# Altium PCB Charging_Dock_PCB.PcbDoc (part 1 of 2)
Units mm, origin at the board's own origin, x right, y up, seen from the top; angles counter-clockwise.
Board outline 320 x 215 mm, 2 copper layers (Top Layer, Bottom Layer); 121 components, 72 nets, 386 pads, 90 vias.
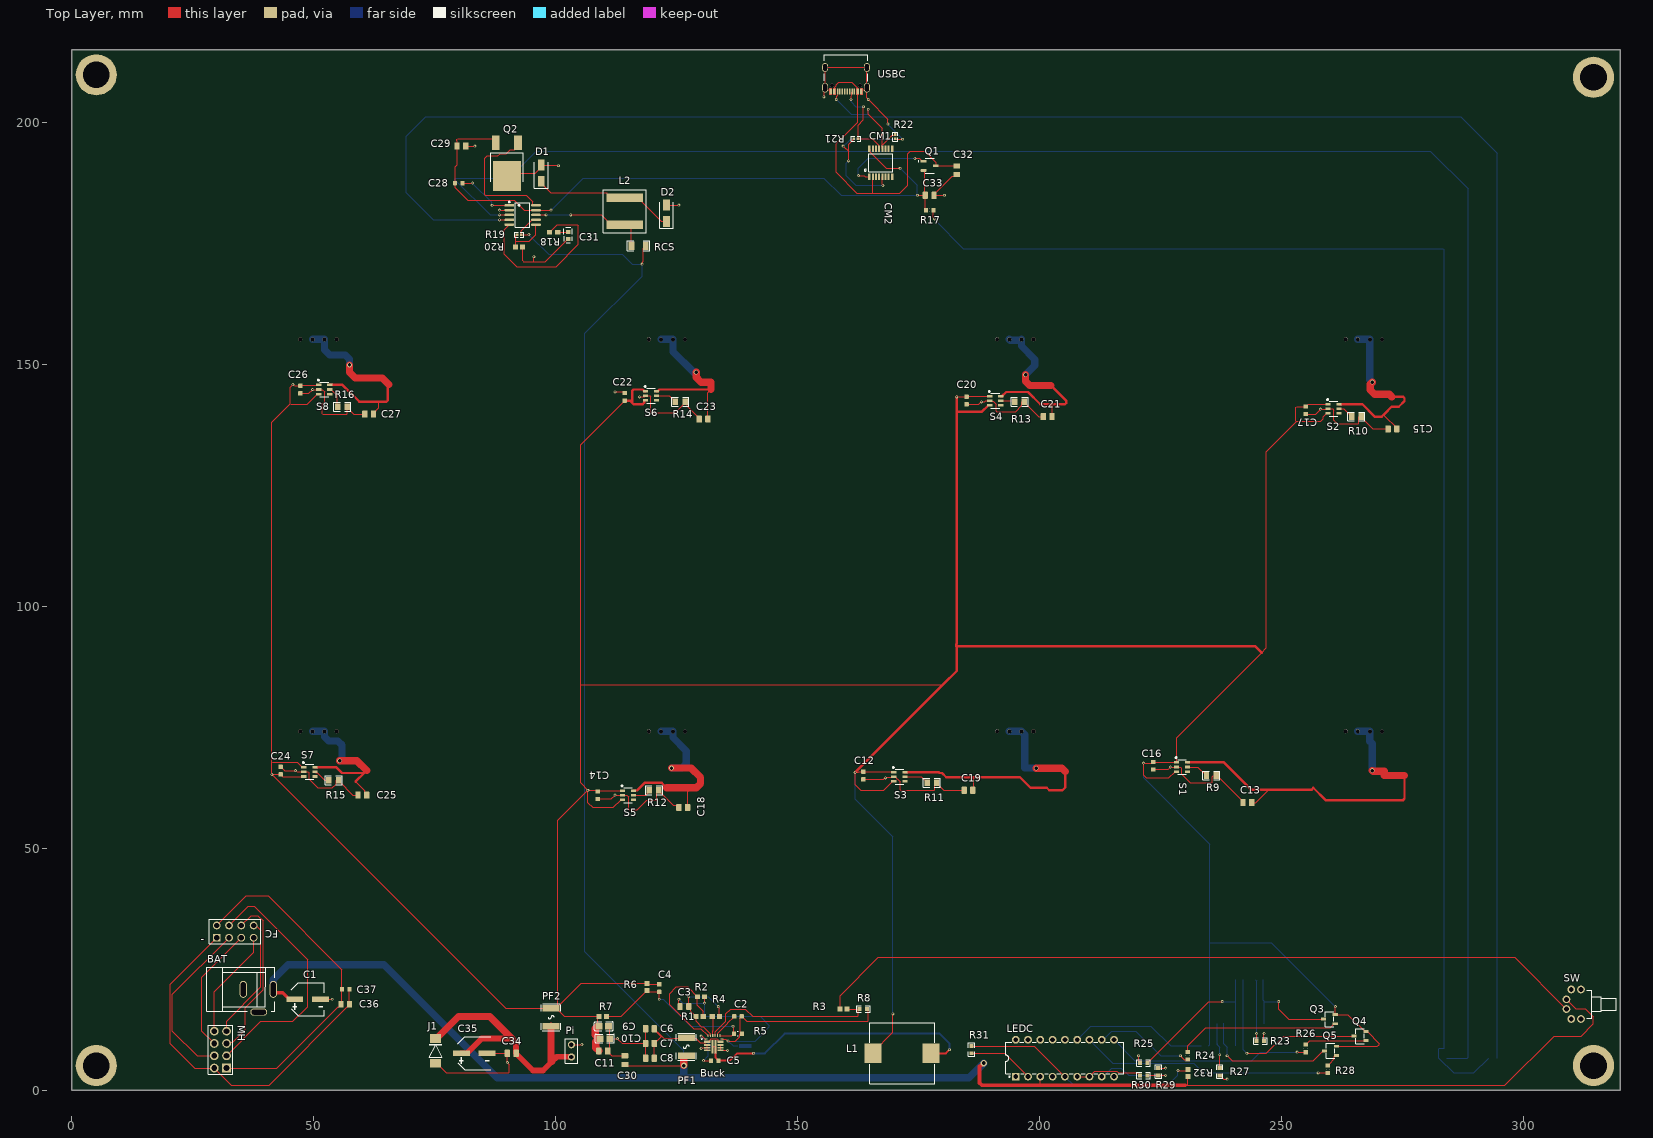
[diagram p0: Top Layer view]
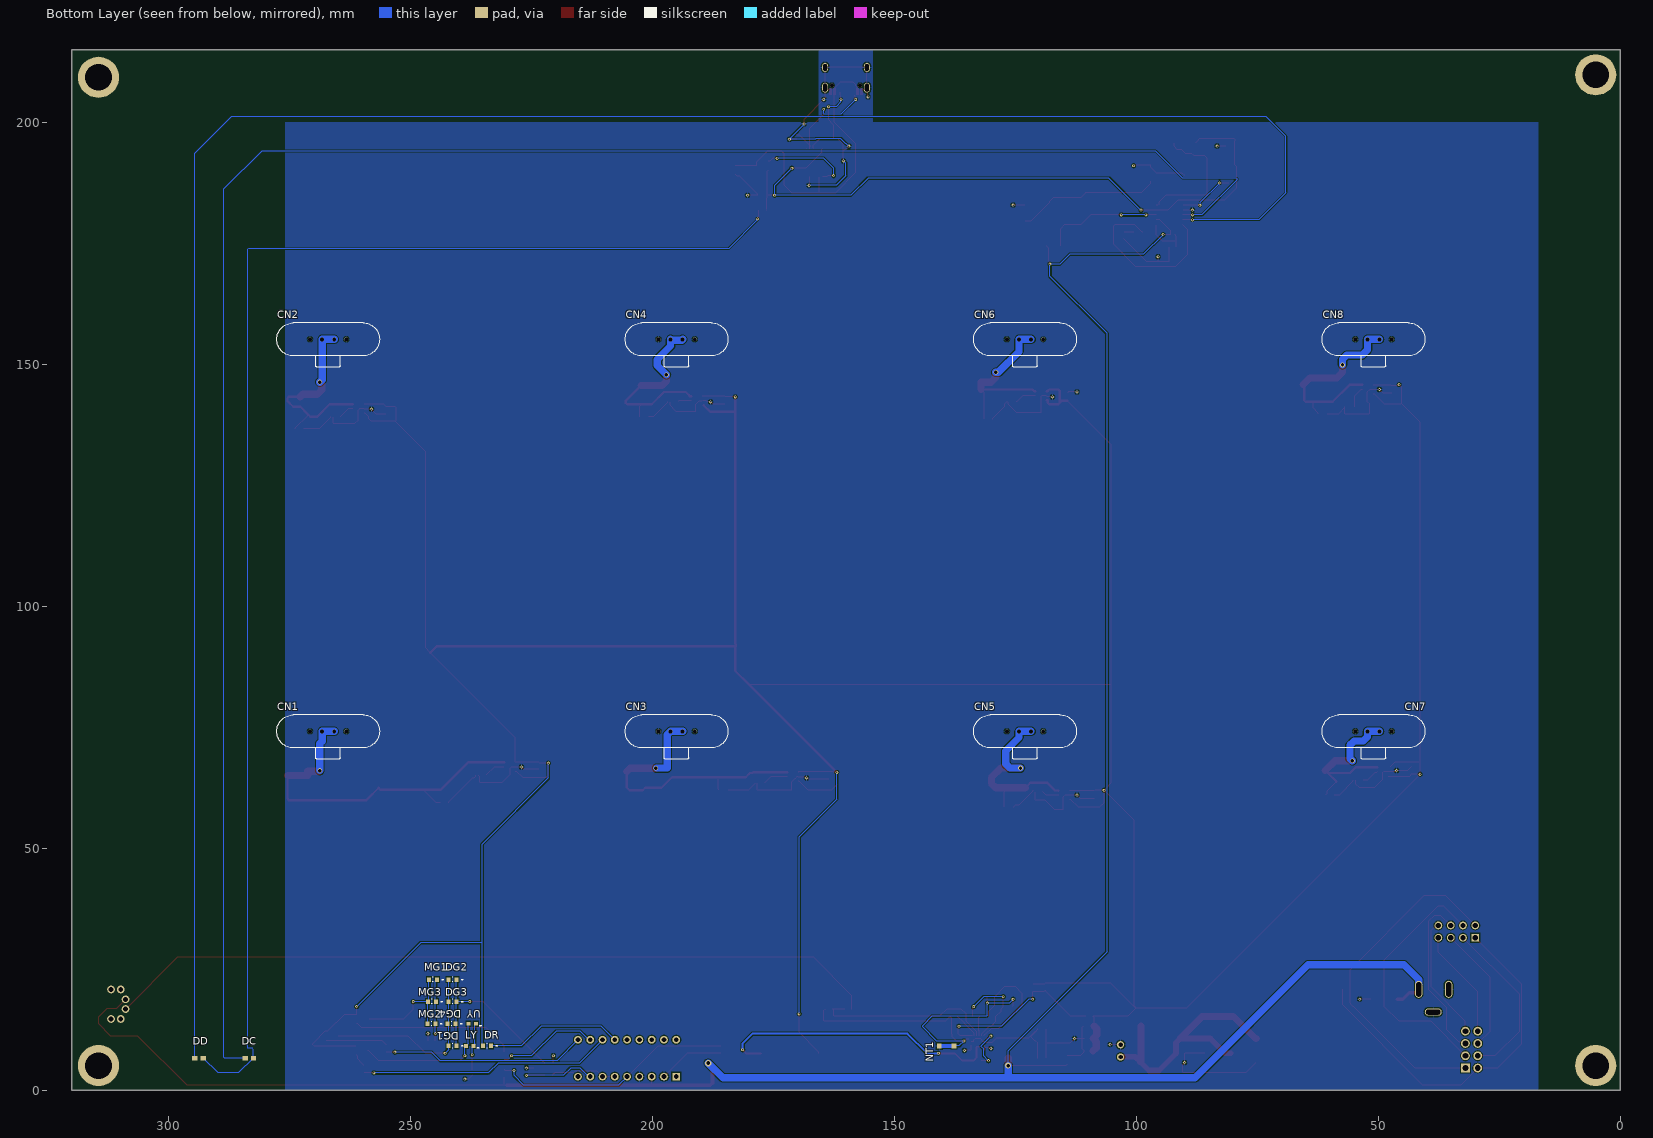
[diagram p1: Bottom Layer view, seen from below]

## Layer stack, top to bottom
Top Solder: solder mask 0.0102, Solder Resist, Dk 3.5
Top Layer: signal copper 0.0356
Dielectric 1: dielectric 0.32, FR-4, Dk 4.8
Bottom Layer: signal copper 0.0356
Bottom Solder: solder mask 0.0102, Solder Resist, Dk 3.5

## Board outline
0,0 320,0 320,215 0,215

## Design rules (kind name [scope] priority, off if disabled: settings)
Clearance [All] p1: gap=0.19 ignorepadtopadclearanceinfootprint=TRUE
HoleSize [All] p1: absolutevalues=TRUE maxlimit=6 minlimit=0.25 maxpercent=80.000 minpercent=20.000
MinimumSolderMaskSliver [All] p1: minsoldermaskwidth=0.1
PolygonConnect [All] p1: connectstyle=Relief reliefconductorwidth=0.254 reliefentries=4 polygonreliefangle="90 Angle" airgapwidth=0.254
RoutingVias [All] p1: holewidth=0.711 width=1.27 viastyle="Through Hole" minholewidth=0.711 minwidth=1.27 maxholewidth=0.711 maxwidth=1.27
SilkToSilkClearance [All] p1: silktosilkclearance=0.15
SilkToSolderMaskClearance [IsPad] p1: minsilkscreentomaskgap=0.1 clearancetoexposedcopper=TRUE
SolderMaskExpansion [All] p1: expansion=0.102 istentingtop=FALSE
SupplyNets "Schematic Supply Nets" [InNet('PGND')] p1: voltage=0.000
Width Width_14 [InNetClass('VBUS')] p1: maxlimit=1 minlimit=0.4 preferedwidth=0.5 minimp=50.000000 maximp=50.000000 favimp=50.000000
Width Width_13 [InNetClass('TEMP')] p2: maxlimit=0.25 minlimit=0.15 preferedwidth=0.2 minimp=50.000000 maximp=50.000000 favimp=50.000000
Width Width_12 [InNetClass('ILIM')] p3: maxlimit=0.25 minlimit=0.15 preferedwidth=0.2 minimp=50.000000 maximp=50.000000 favimp=50.000000
Width Width_11 [InNetClass('MOSFETG')] p4: maxlimit=0.35 minlimit=0.2 preferedwidth=0.25 minimp=50.000000 maximp=50.000000 favimp=50.000000
Width Width_10 [InNetClass('USB')] p5: maxlimit=0.25 minlimit=0.15 preferedwidth=0.2 minimp=50.000000 maximp=50.000000 favimp=50.000000
Width Width_9 [InNetClass('ANG')] p6: maxlimit=0.25 minlimit=0.15 preferedwidth=0.2 minimp=50.000000 maximp=50.000000 favimp=50.000000
Width Width_1 [InNetClass('CTRL')] p7: maxlimit=0.3 minlimit=0.15 preferedwidth=0.2 minimp=50.000000 maximp=50.000000 favimp=50.000000
Width Width_8 [InNetClass('CHRGPW')] p8: maxlimit=2 minlimit=0.2 preferedwidth=0.8 minimp=50.000000 maximp=50.000000 favimp=50.000000
Width Width_7 [InNetClass('NRFG')] p9: maxlimit=1 minlimit=0.5 preferedwidth=0.8 minimp=50.000000 maximp=50.000000 favimp=50.000000
Width Width_6 [InNetClass('NRFP')] p10: maxlimit=0.8 minlimit=0.3 preferedwidth=0.5 minimp=50.000000 maximp=50.000000 favimp=50.000000
Width Width_5 [InNetClass('NRF')] p11: maxlimit=3 minlimit=0.2 preferedwidth=0.25 minimp=50.000000 maximp=50.000000 favimp=50.000000
Width Width_4 [InNetClass('BUCK')] p12: maxlimit=3 minlimit=0.2 preferedwidth=0.25 minimp=50.000000 maximp=50.000000 favimp=50.000000
Width Width_3 [InNetClass('SW')] p13: maxlimit=0.6 minlimit=0.3 preferedwidth=0.4 minimp=50.000000 maximp=50.000000 favimp=50.000000
Width Width_2 [InNetClass('AGND')] p14: maxlimit=0.3 minlimit=0.15 preferedwidth=0.2 minimp=50.000000 maximp=50.000000 favimp=50.000000
Width [InNetClass('5V')] p15: maxlimit=2 minlimit=0.15 preferedwidth=1.5 minimp=50.000000 maximp=50.000000 favimp=50.000000
26 further rules are at their usual default settings.

## Components (designator, comment, footprint, x,y, rotation, side; value= is the part's Value field where it differs from the comment)
BAT "DC-470-2.1GP" DC-IN-TH_DC-470-2.1GP 35.473,20.077 r0 top
Buck "TPS56C215RNNR" QFN50P350X350X100-18N 132.706,9.622 r0 top
C1 "SPT1EM221E08TRVZC" CAP-SMD_BD6.3-L6.6-W6.6-LS7.3-FD 48.768,18.796 r0 top
C2 "CL10B223KB8NNNC" CAPC1608X90N#1 137.668,15.24 r180 top
C3 "CL21A475KAQNNNE" CAPC2012X140N 126.613,17.272 r0 top
C4 "CL10C220JB8NNNC" CAPC1608X90N#2 121.412,21.1 r270 top
C5 "CL10B104KB8NNNC" CAPC1608X90N#2 132.86,6.096 r0 top
C6 "CL21A106KAYNNNE" CAPC2012X145N 119.496,12.7 r180 top
C7 "CL21A106KAYNNNE" CAPC2012X145N 119.496,9.652 r180 top
C8 "CL21A106KAYNNNE" CAPC2012X145N 119.496,6.604 r180 top
C9 "GRM21BR61A476ME15L" C0805 110.12,13.208 r180 top
C10 "GRM21BR61A476ME15L" C0805 110.352,10.668 r180 top
C11 "CL21A106KAYNNNE" CAPC2012X145N 109.844,8.128 r0 top
C12 "CL10B104KB8NNNC" CAPC1608X90N#2 163.576,65.024 r270 top
C13 "CL21A106KAYNNNE" CAPC2012X145N 242.94,59.436 r180 top
C14 "CL10B104KB8NNNC" CAPC1608X90N#2 108.712,60.96 r270 top
C15 "CL21A106KAYNNNE" CAPC2012X145N 272.912,136.652 r0 top
C16 "CL10B104KB8NNNC" CAPC1608X90N#2 223.52,67.056 r270 top
C17 "CL10B104KB8NNNC" CAPC1608X90N#2 255.016,140.48 r270 top
C18 "CL21A106KAYNNNE" CAPC2012X145N 126.376,58.42 r180 top
C19 "CL21A106KAYNNNE" CAPC2012X145N 185.304,61.976 r180 top
C20 "CL10B104KB8NNNC" CAPC1608X90N#2 184.912,142.512 r270 top
C21 "CL21A106KAYNNNE" CAPC2012X145N 201.676,139.192 r180 top
C22 "CL10B104KB8NNNC" CAPC1608X90N#2 114.3,143.256 r90 top
C23 "CL21A106KAYNNNE" CAPC2012X145N 130.556,138.684 r180 top
C24 "CL10B104KB8NNNC" CAPC1608X90N#2 43.18,66.04 r90 top
C25 "CL21A106KAYNNNE" CAPC2012X145N 60.06,60.96 r180 top
C26 "CL10B104KB8NNNC" CAPC1608X90N#2 47.244,144.78 r270 top
C27 "CL21A106KAYNNNE" CAPC2012X145N 61.468,139.7 r180 top
C28 "CL10B104KB8NNNC" CAPC1608X90N#2 79.992,187.452 r180 top
C29 "CL21A106KAYNNNE" CAPC2012X145N 80.528,195.072 r180 top
C30 "CL21A106KAYNNNE" CAPC2012X145N 114.3,6.212 r270 top
C31 "0603B224K250NT" C0603 102.616,176.592 r90 top
C32 "CL21B105KBFNNNE" CAPC2012X135N 182.88,190.12 r90 top
C33 "CL21A106KAYNNNE" CAPC2012X145N 177.292,184.912 r180 top
C34 "CL21A106KAYNNNE" CAPC2012X145N 90.932,7.62 r0 top
C35 "RST470UF10V029" CAP-SMD_BD6.3-L6.6-W6.6-LS7.2-FD 83.182,7.62 r0 top
C36 "CL21A106KPFNNNE" CAPC2012X135N 56.516,17.78 r0 top
C37 "CL10B104KB8NNNC" CAPC1608X90N#2 56.624,20.828 r0 top
CM1 "IP2721" TSSOP16 167.173,191.639 r0 top
CM2 "CN3765" SSOP-10_L4.9-W3.9-P1.00-LS6.0-BL 524.137,635.89 r270 top
CN1 "YZP0048-20048-04025-03" CONN-SMD_4P-P2.50-YZP0048-20048-04025-03 267,73 r180 bottom locked
CN2 "YZP0048-20048-04025-03" CONN-SMD_4P-P2.50-YZP0048-20048-04025-03 267,154 r180 bottom locked
CN3 "YZP0048-20048-04025-03" CONN-SMD_4P-P2.50-YZP0048-20048-04025-03 195,73 r180 bottom
CN4 "YZP0048-20048-04025-03" CONN-SMD_4P-P2.50-YZP0048-20048-04025-03 195,154 r180 bottom
CN5 "YZP0048-20048-04025-03" CONN-SMD_4P-P2.50-YZP0048-20048-04025-03 123,73 r180 bottom
CN6 "YZP0048-20048-04025-03" CONN-SMD_4P-P2.50-YZP0048-20048-04025-03 123,154 r180 bottom
CN7 "YZP0048-20048-04025-03" CONN-SMD_4P-P2.50-YZP0048-20048-04025-03 51,73 r180 bottom locked
CN8 "YZP0048-20048-04025-03" CONN-SMD_4P-P2.50-YZP0048-20048-04025-03 51,154 r180 bottom locked
D1 "SS54" DO-214AC 97.028,189.484 r90 top
D2 "SS54" DO-214AC 122.936,181.202 r90 top
DC "LTST-S270TBKT" 0603 283.298,6.604 r180 bottom locked
DD "LTST-C191KSKT" 0603 293.694,6.604 r180 bottom locked
DG1 "LTST-C190KGKT" LEDC1608X35N 241.3,9.144 r0 bottom
DG2 "LTST-C190KGKT" LEDC1608X35N 241.3,22.86 r0 bottom
DG3 "LTST-C190KGKT" LEDC1608X35N 241.3,18.288 r0 bottom
DG4 "LTST-C190KGKT" LEDC1608X35N 241.506,13.716 r0 bottom
DR "LTST-C190KRKT" LEDC1608X35N 234.188,9.144 r0 bottom
FC "2.54-2*4" HDR-TH_8P-P2.54-V-F-R2-C4-S2.54 33.782,32.766 r0 top
J1 "SMAJ5.0A" DO-214AA 75.184,8.128 r270 top
L1 "MWSA1205S-2R2MT" IND-SMD_L13.5-W12.6 171.608,7.62 r180 top
L2 "NR8040T100M" NR8040T220M 114.3,181.616 r270 top
LEDC "HT3914ANZ" CDIP-18_L24.4-W6.5-P2.54-LS7.6-BL 205.232,6.604 r0 top
LY "LTST-C190KSKT" LEDM1608X80 237.744,9.144 r0 bottom
MG1 "LTST-C190KGKT" LEDC1608X35N 245.364,22.86 r0 bottom
MG2 "LTST-C190KGKT" LEDC1608X35N 245.666,13.716 r0 bottom
MG3 "LTST-C190KGKT" LEDC1608X35N 245.57,18.288 r0 bottom
MH "A2541WV-2X4P" HDR-TH_8P-P2.54-V-R2-C4-S2.54_A2541WV-2X4P 30.734,8.382 r90 top
NT1 "Nettie" NETTIE 139.192,9.144 r0 bottom net-tie
PF1 "SMD1812P260TF/16" F1812 121.73,2.808 r90 top
PF2 "1812L300MR" F1812 104.33,21.219 r270 top
Pi "PH2.54-1X2P-H25" HDR-TH_2P-P2.54-V-M-4 103.264,8.128 r90 top
Q1 "AO3400A" SOT95P280X125-3N 177.292,191.008 r0 top
Q2 "HXY40P03D" TO-252-2_L6.6-W6.1-P4.57-LS10.1-BR-CW 89.923,191.689 r90 top
Q3 "SS8550-G" SOT-23-3_L2.9-W1.6-P1.90-LS2.8-BR 259.877,14.666 r0 top
Q4 "SS8550-G" SOT-23-3_L2.9-W1.6-P1.90-LS2.8-BR 266.192,11.176 r0 top
Q5 "SS8550-G" SOT-23-3_L2.9-W1.6-P1.90-LS2.8-BR 260.096,8.128 r0 top
R1 "RC0603FR-07100KL" RESC1607X60N 129.767,15.24 r180 top
R2 "RC0603FR-0733KL" RESC1607X60N 130.048,19.304 r0 top
R3 "RC0603FR-07100KL" RESC1607X60N 159.512,16.764 r0 top
R4 "RC0603FR-0710KL" RESC1607X60N 133.096,15.24 r0 top
R5 "RC0603FR-071K3L" RESC1608X55N#1 137.668,11.684 r0 top
R6 "RC0603FR-0710KL" RESC1607X60N 118.872,21.336 r90 top
R7 "RC0603FR-0710KL" RESC1607X60N 109.728,15.24 r0 top
R8 "RCT0320KJLF" R0603 163.576,16.764 r0 top
R9 "ARG05DTC2502" R0805 235.204,65.024 r0 top
R10 "ARG05DTC2502" R0805 265.176,139.192 r0 top
R11 "ARG05DTC2502" R0805 177.458,63.5 r0 top
R12 "ARG05DTC2502" R0805 120.054,61.976 r0 top
R13 "ARG05DTC2502" R0805 195.58,142.24 r0 top
R14 "ARG05DTC2502" R0805 125.476,142.24 r0 top
R15 "ARG05DTC2502" R0805 53.848,64.008 r0 top
R16 "ARG05DTC2502" R0805 55.644,141.224 r0 top
R17 "0603WAF1001T5E" RESC1608X55N#2 177.292,181.864 r180 top
R18 "RC0603FR-07120RL" RESC1608X55 99.568,177.292 r180 top
R19 "0402WGF9533TCE" R0402 92.456,176.784 r0 top
R20 "RC0603FR-07100KL" RESC1607X60N 92.456,174.244 r180 top
R21 "0402WGF5101TCE" R0402 162.052,196.596 r180 top
R22 "0402WGF5101TCE" R0402 170.18,197.029 r270 top
R23 "0603WAF1500T5E" R0603 245.609,10.16 r0 top
R24 "0603WAF1001T5E" RESC1608X55N#3 230.632,7.112 r90 top
R25 "0603WAF1500T5E" R0603 221.488,5.588 r180 top
R26 "0603WAF1001T5E" RESC1608X55N#3 255.016,8.636 r90 top
R27 "0603WAF1500T5E" R0603 237.236,3.819 r270 top
R28 "0603WAF1001T5E" RESC1608X55N#3 259.588,4.336 r90 top
R29 "0603WAF3011T5E" R0603 224.536,3.819 r270 top
R30 "0603WAF1201T5E" R0603 221.488,3.048 r180 top
R31 "53.6kΩ" R0603 185.928,8.373 r90 top
R32 "RC0603FR-07100KL" RESC1607X60N 230.632,3.556 r90 top
RCS "CR1206F0R06P05" R1206 116.332,174.752 r0 top
S1 "TPS2553DDBVR" SOT-23-6_L2.9-W1.6-P0.95-LS2.8-BL 229.108,66.548 r270 top
S2 "TPS2553DDBVR" SOT-23-6_L2.9-W1.6-P0.95-LS2.8-BL 260.397,140.552 r270 top
S3 "TPS2553DDBVR" SOT-23-6_L2.9-W1.6-P0.95-LS2.8-BL 170.688,64.516 r270 top
S4 "TPS2553DDBVR" SOT-23-6_L2.9-W1.6-P0.95-LS2.8-BL 190.5,142.24 r270 top
S5 "TPS2553DDBVR" SOT-23-6_L2.9-W1.6-P0.95-LS2.8-BL 114.601,60.73 r270 top
S6 "TPS2553DDBVR" SOT-23-6_L2.9-W1.6-P0.95-LS2.8-BL 119.38,143.256 r270 top
S7 "TPS2553DDBVR" SOT-23-6_L2.9-W1.6-P0.95-LS2.8-BL 48.768,65.532 r270 top
S8 "TPS2553DDBVR" SOT-23-6_L2.9-W1.6-P0.95-LS2.8-BL 51.851,144.55 r270 top
SW "XKB5858-Z-E" SW-TH_XKB5858-Z-E 313.677,17.764 r270 top
USBC "TYPE-C-31-M-12" USB-C_SMD-TYPE-C-31-M-12_1 160,209.902 r180 top
UY "LTST-C190KSKT" LEDM1608X80 237.236,13.716 r0 bottom

## Footprints (in the part's own frame and the unit in brackets; to place one, negate y for a bottom-side part, rotate by r counter-clockwise, add the part's x,y. Pads: shape width x height; smd on the part's side, far side on the other; paste and mask are expansions set on the pad)
0603 [mm]
  rect 1.1x1 smd: 1(-0.85,0) 2(0.85,0)
  body extent -0.82,-0.3 0.82,0.3, height 1.15
C0603 [mm]
  rect 0.8x0.9 smd paste+0 mask+0.051: 1(-0.7,0) 2(0.7,0)
  silkscreen extent -1.52,-0.84 1.69,0.89
C0805 [mm]
  rect 1.41x1.35 smd paste-100 mask+0.051: 1(-0.813,0) 2(1.187,0)
  silkscreen extent -1.78,-0.9 2.15,0.9
CAP-SMD_BD6.3-L6.6-W6.6-LS7.2-FD [mm]
  rect 3.5x1.2 smd paste+0 mask+0.051: 1(-2.67,0) 2(2.67,0)
  silkscreen extent -3.38,-3.38 3.38,3.38
CAP-SMD_BD6.3-L6.6-W6.6-LS7.3-FD [mm]
  rect 3.5x1.2 smd paste+0 mask+0.051: 1(-2.67,0) 2(2.67,0)
  silkscreen extent -3.38,-3.38 3.43,3.38
CAPC1608X90N#1 [mm]
  rrect25% 0.87x0.93 smd paste+0 mask+0.102: 1(-0.78,0) 2(0.78,0)
  body extent -0.8,-0.4 0.8,0.4, height 0.9
CAPC1608X90N#2 [mm]
  rrect25% 0.87x0.93 smd: 1(-0.78,0) 2(0.78,0)
  body extent -0.8,-0.4 0.8,0.4, height 0.9
CAPC2012X135N [mm]
  rrect25% 1.05x1.38 smd: 1(-0.888,0) 2(0.888,0)
  body extent -1,-0.63 1,0.63, height 1.35
CAPC2012X140N [mm]
  rrect25% 1.08x1.42 smd: 1(-0.895,0) 2(0.895,0)
  body extent -1,-0.63 1,0.63, height 1.4
CAPC2012X145N [mm]
  rrect25% 1.11x1.47 smd: 1(-0.9,0) 2(0.9,0)
  body extent -1,-0.63 1,0.63, height 1.45
CDIP-18_L24.4-W6.5-P2.54-LS7.6-BL [mm]
  rect 1.6x1.6 hole 1 paste-2539.97 mask+0.051: 1(-10.16,-3.81)
  round 1.6 hole 1 paste-2539.97 mask+0.051: 2(-7.62,-3.81) 3(-5.08,-3.81) 4(-2.54,-3.81) 5(0,-3.81) 6(2.54,-3.81) 7(5.08,-3.81) 8(7.62,-3.81) 9(10.16,-3.81) 10(10.16,3.81) 11(7.62,3.81) 12(5.08,3.81) 13(2.54,3.81) 14(0,3.81) 15(-2.54,3.81) 16(-5.08,3.81) 17(-7.62,3.81) 18(-10.16,3.81)
  silkscreen extent -12.2,-3.93 12.2,3.25
CONN-SMD_4P-P2.50-YZP0048-20048-04025-03 [mm]
  round 0.8 hole 0.8 paste-2539.97: 1(-3.75,1.143) 2(-1.25,1.143) 3(1.25,1.143) 4(3.75,1.143)
  silkscreen extent -10.61,-4.57 10.61,4.57
DC-IN-TH_DC-470-2.1GP [mm]
  oval 1.5x3.5 hole 1 slot 3 at 90 deg paste-2539.97 mask+0.051: 1(6.183,0.751) 2(-0.017,0.751)
  oval 3.5x1.5 hole 1 slot 3 at 0 deg paste-2539.97 mask+0.051: 3(3.183,-3.95)
  silkscreen extent -7.56,-3.82 6.5,5.32
DO-214AA [mm]
  rect 1.8x2.2 smd paste+0 mask+0.102: A(2.55,0) C(-2.55,0)
  silkscreen extent -1.27,-1.34 1.32,1.34, body extent -2.57,-1.28 2.57,1.28, height 1.15
DO-214AC [mm]
  rect 2.256x1.432 smd: A(1.678,0) C(-1.678,0)
  silkscreen extent -3.12,-1.4 2.3,1.4
F1812 [mm]
  rect 1.407x3.499 smd paste-100 mask+0.051: 1(4.304,-5.27) 2(8.011,-5.27)
  silkscreen extent 3.36,-7.3 8.95,-3.24
HDR-TH_2P-P2.54-V-M-4 [mm]
  round 1.5 hole 0.9 paste-2539.97 mask+0.05: 1(-1.27,0) 2(1.27,0)
  silkscreen extent -2.54,-1.27 2.54,1.27
HDR-TH_8P-P2.54-V-F-R2-C4-S2.54 [mm]
  rect 1.6x1.6 hole 1.1 paste-2539.97 mask+0.051: 1(-3.81,-1.27)
  round 1.6 hole 1.1 paste-2539.97 mask+0.051: 2(-3.81,1.27) 3(-1.27,-1.27) 4(-1.27,1.27) 5(1.27,-1.27) 6(1.27,1.27) 7(3.81,-1.27) 8(3.81,1.27)
  silkscreen extent -5.33,-2.54 5.33,2.54
HDR-TH_8P-P2.54-V-R2-C4-S2.54_A2541WV-2X4P [mm]
  rect 1.8x1.8 hole 1.2 paste-2539.97 mask+0.051: 1(-3.81,-1.27)
  round 1.8 hole 1.2 paste-2539.97 mask+0.051: 2(-3.81,1.27) 3(-1.27,-1.27) 4(-1.27,1.27) 5(1.27,-1.27) 6(1.27,1.27) 7(3.81,-1.27) 8(3.81,1.27)
  silkscreen extent -5.08,-2.54 5.08,2.54
IND-SMD_L13.5-W12.6 [mm]
  rect 3.5x4 smd paste+0 mask+0.051: 1(-6,0) 2(6,0)
  silkscreen extent -6.75,-6.3 6.75,6.3
LEDC1608X35N [mm]
  rect 0.81x0.93 smd: A(0.81,0) C(-0.81,0)
  silkscreen extent -2.1,-0.45 0.08,0.45
LEDM1608X80 [mm]
  rect 0.8x0.8 smd: A(0.75,0) C(-0.75,0)
  silkscreen extent -1.83,0.27 -1.57,0.53
NETTIE [mm]
  rect 1x1 smd mask-10: 1(-1.524,0) 2(1.524,0)
  Top Layer region: -1.27,0.381 1.27,0.381 1.27,-0.381 -1.27,-0.381
NR8040T220M [mm]
  rect 1.8x7.5 smd: 1(-2.8,0) 2(2.8,0)
  silkscreen extent -4.45,-4.45 4.45,4.45, body extent -4,-4 4,4, height 4.2
QFN50P350X350X100-18N [mm]
  rect 0.6x0.25 smd mask+0: 1(-1.65,0.925) 12(1.65,0.925)
  rect 1.25x0.5 smd paste-2 mask+0: 2(-1.375,0.35) 11(1.375,0.35)
  rect 1.25x0.35 smd paste-2 mask+0: 3(-1.375,-0.3) 4(-1.375,-0.85) 5(-1.375,-1.4) 8(1.375,-1.4) 9(1.375,-0.85) 10(1.375,-0.3)
  rect 0.4x2.7 smd paste-2 mask+0: 6(-0.3,-0.65) 7(0.3,-0.65)
  rect 0.25x0.6 smd mask+0: 13(1.25,1.65) 14(0.75,1.65) 15(0.25,1.65) 16(-0.25,1.65)
  rect 0.203x0.559 smd mask+0.051: 17(-0.75,1.65) 18(-1.25,1.65)
  silkscreen extent -2.58,0.84 -2.44,0.98, body extent -1.75,-1.75 1.75,1.75, height 1
R0402 [mm]
  rect 0.566x0.54 smd paste-100 mask+0.051: 1(-0.433,0) 2(0.433,0)
  silkscreen extent -0.94,-0.5 0.94,0.5
R0603 [mm]
  rect 0.806x0.864 smd paste-100 mask+0.051: 1(-0.753,0) 2(0.753,0)
  silkscreen extent -1.39,-0.66 1.39,0.66
R0805 [mm]
  rect 1.133x1.377 smd paste-100 mask+0.051: 1(-0.712,0) 2(1.288,0)
  silkscreen extent -1.47,-0.92 2.05,0.92
R1206 [mm]
  rect 1.208x1.701 smd paste-100 mask+0.051: 1(-0.678,-0.267) 2(2.279,-0.267)
  silkscreen extent -1.51,-1.35 3.11,0.81
RESC1607X60N [mm]
  rect 1.04x1.02 smd: 1(-0.735,0) 2(0.735,0)
  body extent -0.8,-0.4 0.8,0.4, height 0.55
RESC1608X55 [mm]
  rect 1.1x1 smd: 1(-0.85,0) 2(0.85,0)
  body extent -0.8,-0.4 0.8,0.4, height 0.55
RESC1608X55N#1 [mm]
  rect 0.79x0.93 smd: 1(-0.82,0) 2(0.82,0)
  silkscreen extent -0.11,-0.45 0.11,0.45, body extent -0.8,-0.4 0.8,0.4, height 0.55
RESC1608X55N#2 [mm]
  rect 0.87x0.93 smd paste+0 mask+0.102: 1(-0.78,0) 2(0.78,0)
  silkscreen extent -0.02,-0.4 0.02,0.4
RESC1608X55N#3 [mm]
  rect 0.87x0.93 smd: 1(-0.78,0) 2(0.78,0)
  silkscreen extent -0.03,-0.4 0.03,0.4, body extent -0.8,-0.4 0.8,0.4, height 0.55
SOT95P280X125-3N [mm]
  rrect50% 1.21x0.59 smd: 1(-1.255,0.95) 2(-1.255,-0.95) 3(1.255,0)
  silkscreen extent -2.41,-1.55 0.9,1.55, body extent -1.4,-1.45 1.4,1.45, height 1.25
SOT-23-3_L2.9-W1.6-P1.90-LS2.8-BR [mm]
  rect 1.07x0.6 smd paste+0 mask+0.051: 1(1.235,-0.95) 2(1.235,0.95) 3(-1.235,0)
  silkscreen extent -0.88,-1.54 0.88,1.54
SOT-23-6_L2.9-W1.6-P0.95-LS2.8-BL [mm]
  rect 0.532x1.072 smd paste+0 mask+0.051: 1(-1.18,-0.809) 2(-0.23,-0.809) 3(0.72,-0.809) 4(0.72,1.489) 5(-0.23,1.489) 6(-1.18,1.489)
  silkscreen extent -2.31,-1.04 1.31,1.23
SSOP-10_L4.9-W3.9-P1.00-LS6.0-BL [mm]
  oval 0.525x2.014 smd paste+0 mask+0.051: 1(453.042,-433.713) 2(454.042,-433.713) 3(455.042,-433.713) 4(456.042,-433.713) 5(457.042,-433.713) 6(457.042,-428.199) 7(456.042,-428.199) 8(455.042,-428.199) 9(454.042,-428.199) 10(453.042,-428.199)
  silkscreen extent 452.18,-433.86 457.57,-429.43
SW-TH_XKB5858-Z-E [mm]
  round 1.6 hole 1 paste-2539.97 mask+0.051: 1(-3.05,-1.813) 2(-3.05,-3.813) 3(3.05,-1.813) 4(3.05,-3.813) 5(-1,-4.813) 6(1,-4.813)
  silkscreen extent -2.9,-0.64 2.92,5.49
TO-252-2_L6.6-W6.1-P4.57-LS10.1-BR-CW [mm]
  rect 3x1.6 smd paste+0 mask+0.051: 1(4.059,-2.285) 3(4.059,2.285)
  rect 6.2x5.8 smd paste+0 mask+0.051: 2(-2.789,0)
  silkscreen extent -3.95,-3.35 2.02,3.35
TSSOP16 [mm]
  rect 0.6x1.35 smd mask+0.013: P$1(-2.375,-2.925) P$8(2.375,-2.925) P$9(2.375,2.925) P$16(-2.375,2.925)
  rect 0.4x1.35 smd mask+0.013: P$2(-1.625,-2.925) P$3(-0.975,-2.925) P$4(-0.325,-2.925) P$5(0.325,-2.925) P$6(0.975,-2.925) P$7(1.625,-2.925) P$10(1.625,2.925) P$11(0.975,2.925) P$12(0.325,2.925) P$13(-0.325,2.925) P$14(-0.975,2.925) P$15(-1.625,2.925)
  silkscreen extent -3.4,-1.91 2.5,1.9
USB-C_SMD-TYPE-C-31-M-12_1 [mm]
  oval 1.2x2 hole 0.8 slot 1.6 at 90 deg paste-2539.97 mask+0.025: 1(4.325,2.754) 4(-4.325,2.754)
  oval 1.2x1.8 hole 0.8 slot 1.4 at 90 deg paste-2539.97 mask+0.025: 2(4.325,-1.426) 3(-4.325,-1.426)
  oval 0.508x1.3 smd mask+0.025: A1B12(-3.175,3.556) A4B9(-2.413,3.556) B1A12(3.175,3.556) B4A9(2.413,3.556)
  rect 0.3x1.3 smd paste-100 mask+0.005: A5(-1.25,3.523) A6(-0.25,3.523) A7(0.25,3.523) A8(1.25,3.523) B5(1.75,3.523) B6(0.75,3.523) B7(-0.75,3.523) B8(-1.75,3.523)
  round 0.75 hole 0.75 unplated paste-2539.97 mask+0.051: ""(-2.9,2.254) ""(2.9,2.254)
  Top Layer region: -2.921,2.873 -2.921,4.173 -3.2,4.173 -3.429,4.173 -3.429,2.872 -3.2,2.872
  Top Layer region: 2.921,4.173 2.921,2.873 3.2,2.873 3.5,2.873 3.5,4.173 3.2,4.173
  Top Layer region: 2.667,2.873 2.667,4.173 2.4,4.173 2.159,4.173 2.159,2.873 2.4,2.873
  Top Layer region: -2.159,2.873 -2.159,4.172 -2.4,4.172 -2.667,4.172 -2.667,2.872 -2.4,2.872
  silkscreen extent -4.47,-4.05 4.47,1.4

## Part data
Buck: "3.8-V to 17-V, 12-A synchronous SWIFTâ„¢ buck converter with D-CAP3 control", Package="VQFN-HR-18 Texas Instruments", Check_prices=https://www.snapeda.com/parts/TPS56C215RNNR/Texas+Instruments/view-part/?ref=eda, MF="Texas Instruments", MP=TPS56C215RNNR, SnapEDA_Link=https://www.snapeda.com/parts/TPS56C215RNNR/Texas+Instruments/view-part/?ref=snap
C1: "220uF"
C2: "0.022 ÂµF Â±10% 50V Ceramic Capacitor X7R 0603 (1608 Metric)", Package="SMD-2 Samsung", Check_prices=https://www.snapeda.com/parts/CL10B223KB8NNNC/Samsung/view-part/?ref=eda, MF=Samsung, MP=CL10B223KB8NNNC, SnapEDA_Link=https://www.snapeda.com/parts/CL10B223KB8NNNC/Samsung/view-part/?ref=snap
C3: "4.7 ÂµF Â±10% 25V Ceramic Capacitor X5R 0805 (2012 Metric)", Package="SMD-2 Samsung", Check_prices=https://www.snapeda.com/parts/CL21A475KAQNNNE/Samsung/view-part/?ref=eda, MF="Samsung Electro-Mechanics", MP=CL21A475KAQNNNE, SnapEDA_Link=https://www.snapeda.com/parts/CL21A475KAQNNNE/Samsung/view-part/?ref=snap
C4: "22 pF Â±5% 50V Ceramic Capacitor C0G, NP0 0603 (1608 Metric)", Package="SMD-2 Samsung", Check_prices=https://www.snapeda.com/parts/CL10C220JB8NNNC/Samsung/view-part/?ref=eda, MF="Samsung Electro-Mechanics", MP=CL10C220JB8NNNC, SnapEDA_Link=https://www.snapeda.com/parts/CL10C220JB8NNNC/Samsung/view-part/?ref=snap
C5 C12 C14 C16 C17 C20 C22 C24 C26 C28 C37: "0.1 ÂµF Â±10% 50V Ceramic Capacitor X7R 0603 (1608 Metric)", Package="SMD-2 Samsung", Check_prices=https://www.snapeda.com/parts/CL10B104KB8NNNC/Samsung/view-part/?ref=eda, MF="Samsung Electro-Mechanics", MP=CL10B104KB8NNNC, SnapEDA_Link=https://www.snapeda.com/parts/CL10B104KB8NNNC/Samsung/view-part/?ref=snap
C6 C7 C8 C11 C13 C15 C18 C19 C21 C23 C25 C27 C29 C30 C33 C34: "10 ÂµF Â±10% 25V Ceramic Capacitor X5R 0805 (2012 Metric)", Package="SMD-2 Samsung", Check_prices=https://www.snapeda.com/parts/CL21A106KAYNNNE/Samsung/view-part/?ref=eda, MF=Samsung, MP=CL21A106KAYNNNE, SnapEDA_Link=https://www.snapeda.com/parts/CL21A106KAYNNNE/Samsung/view-part/?ref=snap
C9 C10: "47uF"
C31: "220nF"
C32: "1 ÂµF Â±10% 50V Ceramic Capacitor X7R 0805 (2012 Metric)", Package="SMD-2 Samsung", Check_prices=https://www.snapeda.com/parts/CL21B105KBFNNNE/Samsung/view-part/?ref=eda, MF=Samsung, MP=CL21B105KBFNNNE, SnapEDA_Link=https://www.snapeda.com/parts/CL21B105KBFNNNE/Samsung/view-part/?ref=snap
C35: "470uF"
C36: "10 ÂµF Â±10% 10V Ceramic Capacitor X5R 0805 (2012 Metric)", Package="SMD-2 Samsung", Check_prices=https://www.snapeda.com/parts/CL21A106KPFNNNE/Samsung/view-part/?ref=eda, MF=Samsung, MP=CL21A106KPFNNNE, SnapEDA_Link=https://www.snapeda.com/parts/CL21A106KPFNNNE/Samsung/view-part/?ref=snap
CM1: "PD3.0 Physical Layer IC for USB TYPE-C input Interfaces", Package=Package, Check_prices=https://www.snapeda.com/parts/IP2721/Injoinic/view-part/?ref=eda, MF=Injoinic, MP=IP2721, SnapEDA_Link=https://www.snapeda.com/parts/IP2721/Injoinic/view-part/?ref=snap
D1 D2: "Digital Switch Unipolar Switch Open Collector Hall Effect SOT-89B", Package="TO-243AA-243 Honeywell Sensing", Check_prices=https://www.snapeda.com/parts/SS54/Honeywell+Sensing+and+Productivity+Solutions/view-part/?ref=eda, MF="Honeywell Sensing", MP=SS54, SnapEDA_Link=https://www.snapeda.com/parts/SS54/Honeywell+Sensing+and+Productivity+Solutions/view-part/?ref=snap
DC: "Blue 470nm LED Indication - Discrete 3.3V 0603 (1608 Metric)", Package="SMD-2 Lite-On", Check_prices=https://www.snapeda.com/parts/LTST-S270TBKT/Lite-On/view-part/?ref=eda, MF="Lite-On Inc.", MP=LTST-S270TBKT, SnapEDA_Link=https://www.snapeda.com/parts/LTST-S270TBKT/Lite-On/view-part/?ref=snap
DD: "Yellow 591nm LED Indication - Discrete 2.1V 0603 (1608 Metric)", Package="0603 Lite-On Inc.", Check_prices=https://www.snapeda.com/parts/LTST-C191KSKT/Lite-On/view-part/?ref=eda, MF="Lite-On Inc.", MP=LTST-C191KSKT, SnapEDA_Link=https://www.snapeda.com/parts/LTST-C191KSKT/Lite-On/view-part/?ref=snap
DG1 DG2 DG3 DG4 LY MG1 MG2 MG3 UY: Package=None, Availability=Unavailable, MF="{'manufacturer': u'Lite-On Inc.'}", Price=None
  DG1 DG2 DG3 DG4 MG1 MG2 MG3: MP=LTST-C190KGKT
  LY UY: MP=LTST-C190KSKT
DR: "Red 631nm LED Indication - Discrete 2V 0603 (1608 Metric)", Package="0603 Lite-On", Availability="In Stock", Check_prices=https://www.snapeda.com/parts/LTST-C190KRKT/Lite-On+Inc./view-part/?ref=eda, MF="Lite-On Inc.", MP=LTST-C190KRKT, Price=None, Purchase-URL=https://pricing.snapeda.com/search/part/LTST-C190KRKT/?ref=eda, SnapEDA_Link=https://www.snapeda.com/parts/LTST-C190KRKT/Lite-On+Inc./view-part/?ref=snap
J1: "9.2V Clamp 43.5A Ipp Tvs Diode Surface Mount DO-214AC (SMA)", Package="DO-214 Littelfuse", Check_prices=https://www.snapeda.com/parts/SMAJ5.0A/Littelfuse/view-part/?ref=eda, MF=Littelfuse, MP=SMAJ5.0A, SnapEDA_Link=https://www.snapeda.com/parts/SMAJ5.0A/Littelfuse/view-part/?ref=snap
L1: "2.2uH"
L2: "10 ÂµH Shielded Drum Core, Wirewound Inductor 3.1 A 44.2mOhm Max Nonstandard", Package="Nonstandard Taiyo Yuden", Check_prices=https://www.snapeda.com/parts/NR8040T100M/Littelfuse/view-part/?ref=eda, MF="Taiyo Yuden", MP=NR8040T100M, SnapEDA_Link=https://www.snapeda.com/parts/NR8040T100M/Littelfuse/view-part/?ref=snap
PF1: library part SMD1812P260TF/16_C438899
Q1: "N-Channel 30 V 5.7A (Ta) 1.4W (Ta) Surface Mount SOT-23-3", Package="SOT-23 Alpha &amp; Omega Semiconductor Inc.", Check_prices=https://www.snapeda.com/parts/AO3400A/Alpha/view-part/?ref=eda, MF="Alpha & Omega Semiconductor", MP=AO3400A, SnapEDA_Link=https://www.snapeda.com/parts/AO3400A/Alpha/view-part/?ref=snap
R1 R3 R20 R32: "100 kOhms Â±1% 0.1W, 1/10W Chip Resistor 0603 (1608 Metric) Moisture Resistant Thick Film", Package="0603 Yageo", Check_prices=https://www.snapeda.com/parts/RC0603FR-07100KL/Yageo/view-part/?ref=eda, MF=Yageo, MP=RC0603FR-07100KL, SnapEDA_Link=https://www.snapeda.com/parts/RC0603FR-07100KL/Yageo/view-part/?ref=snap
R2: "RES, 33K, 1%, 0.1W, 0603, THICK FILM; Resistor Case Style:0603 [1608 Metric]; Resistance:33kohm; Product Range:RC Series; Voltage Rating:75V; Resistor Element Material:Thick Film; Power Rating:100mW; Resistance Tolerance:Â± 1%; Temperature Coefficient:Â±", Package="0603-2 YAGEO", Check_prices=https://www.snapeda.com/parts/RC0603FR0733KL/Yageo/view-part/?ref=eda, MF="Yageo Corporation", MP=RC0603FR0733KL, SnapEDA_Link=https://www.snapeda.com/parts/RC0603FR0733KL/Yageo/view-part/?ref=snap
R4 R6 R7: "10 kOhms Â±1% 0.1W, 1/10W Chip Resistor 0603 (1608 Metric) Moisture Resistant Thick Film", Package="0603 Yageo", Check_prices=https://www.snapeda.com/parts/RC0603FR-0710KL/Yageo/view-part/?ref=eda, MF=Yageo, MP=RC0603FR-0710KL, SnapEDA_Link=https://www.snapeda.com/parts/RC0603FR-0710KL/Yageo/view-part/?ref=snap
R5: "1.3 kOhms Â±1% 0.1W, 1/10W Chip Resistor 0603 (1608 Metric) Moisture Resistant Thick Film", Package="1608 Yageo", Check_prices=https://www.snapeda.com/parts/RC0603FR-071K3L/Yageo/view-part/?ref=eda, MF=Yageo, MP=RC0603FR-071K3L, SnapEDA_Link=https://www.snapeda.com/parts/RC0603FR-071K3L/Yageo/view-part/?ref=snap
R8: "20kΩ"
R9 R10 R11 R12 R13 R14 R15 R16: "25kΩ"
R17 R24 R26 R28: "1K Ohm 1/10W Thick Film Resistor 0603 Chip - Surface Mount", Package="0603-2 ROYAL", Check_prices=https://www.snapeda.com/parts/0603WAF1001T5E/Uni-Royal/view-part/?ref=eda, MF=Uni-Royal, MP=0603WAF1001T5E, SnapEDA_Link=https://www.snapeda.com/parts/0603WAF1001T5E/Uni-Royal/view-part/?ref=snap
R18: "120 Ohms Â±1% 0.1W, 1/10W Chip Resistor 0603 (1608 Metric) Moisture Resistant Thick Film", Package="1608 Yageo", Check_prices=https://www.snapeda.com/parts/RC0603FR-07120RL/Yageo/view-part/?ref=eda, MF=Yageo, MP=RC0603FR-07120RL, SnapEDA_Link=https://www.snapeda.com/parts/RC0603FR-07120RL/Yageo/view-part/?ref=snap
R19: "953kΩ"
R21 R22: "5.1kΩ"
R23 R25 R27: "150Ω"
R29: "3.01kΩ"
R30: "1.2kΩ"
R31: library part 0603WAF5362T5E
RCS: "60mΩ"

## Free pads (board coordinates)
  round 8.5 hole 5.5 unplated: 1(5.08,5.08) 2(5.08,209.804) 3(314.452,209.296) 4(314.452,5.08)

## Via types
v1: diameter 0.6, hole 0.3, Top Layer to Bottom Layer, 80 vias
v2: diameter 1, hole 0.7, Top Layer to Bottom Layer, 8 vias
v3: diameter 1.27, hole 0.711, Top Layer to Bottom Layer, 1 vias
v4: diameter 1.3, hole 0.8, Top Layer to Bottom Layer, 1 vias

## Nets (pads, with @x,y where several pads share a name; then routed paths per layer and width w, separated by ;. In a path a pad name is that pad's centre, name@x,y a point inside that pad or via, vN(x,y) a via of type N, cw(c..) or ccw(c..) an arc to the next point about the centre after c; other vN are vias at no path point)
5V: C4.1 C9.2 C10.2 C11.1 C12.1 C14.1 C16.1 C17.1 C20.1 C22.1 C24.1 C26.1 DR.A L1.2 PF2.1 Q3.2 Q4.2 Q5.2 R6.2 R7.1 S1.1 S1.3 S2.1 S2.3 S3.1 S3.3 S4.1 S4.3 S5.1 S5.3 S6.1 S6.3 S7.1 S7.3 S8.1 S8.3 | length 944.2
  Top Layer w0.2: v1(41.384,65.26) C24.1@43.18,65.26 ; v1(45.72,145.796) 45.828,145.796 46.064,145.56 C26.1@47.244,145.56 ; v1(106.68,61.976) 106.685,61.971 108.481,61.971 C14.1@108.712,61.74 ; v1(161.897,65.668) 161.932,65.704 162.496,65.704 162.596,65.804 C12.1@163.576,65.804 ; v1(182.88,143.256) 184.876,143.256 C20.1@184.912,143.292 ; v1(221.488,67.564) 221.511,67.587 223.271,67.587 C16.1@223.395,67.711
  Top Layer w0.254: C24.1@43.18,65.26 43.21,65.26 43.658,64.812 S7.3@47.959,64.812 ; v1(45.72,145.796) 45.212,145.288 45.212,141.881 ; C26.1@47.244,145.56 47.329,145.645 50.957,145.645 S8.1@51.042,145.73 ; S7.1@47.689,66.712 46.601,67.8 41.533,67.8 41.384,67.651 ; S8.3@51.042,143.83 50.772,143.83 48.674,141.732 45.361,141.732 45.212,141.881 ; C9.2@108.712,13.208 108.712,14.959 R7.1@108.993,15.24 101.781,15.24 100.106,16.915 105.263,22.071 R6.2@118.872,22.071 119.063,21.88 C4.1@121.412,21.88 ; C14.1@108.712,61.74 108.797,61.825 113.707,61.825 S5.1@113.792,61.91 ; S5.3@113.792,60.01 113.522,60.01 111.932,58.42 107.696,58.42 106.68,59.436 v1(106.68,61.976) ; C22.1@114.3,142.476 105.156,133.332 105.156,83.82 ; v1(161.897,65.668) 161.897,63.147 163.068,61.976 167.789,61.976 169.609,63.796 S3.3@169.879,63.796 ; C12.1@163.576,65.804 163.63,65.75 169.825,65.75 S3.1@169.879,65.696 ; L1.2@165.608,7.62 165.608,7.87 169.672,11.934 v1(169.672,15.748) ; 180.049,83.82 105.156,83.82 ; C20.1@184.912,143.292 184.976,143.356 189.627,143.356 S4.1@189.691,143.42 ; v1(221.488,67.564) 221.488,65.024 221.996,64.516 226.717,64.516 228.029,65.828 S1.3@228.299,65.828 ; C16.1@223.395,67.711 223.466,67.782 228.245,67.782 S1.1@228.299,67.728 228.299,72.851 245.872,90.424 246.888,91.44 246.888,131.931 253.133,138.176 ; C17.1@255.016,141.26 254.98,141.224 254.944,141.26 253.133,141.26 252.984,141.111 252.984,138.325 253.133,138.176 ; C17.1@255.046,141.26 255.518,141.732 S2.1@259.588,141.732 ; S2.3@259.588,139.832 259.318,139.832 258.621,139.135 258.621,138.733 258.064,138.176 253.133,138.176 ; v1(261.112,17.272) Q3.2@261.112,15.616 263.702,15.616 267.192,12.126 Q4.2@267.427,12.126 267.662,12.126 270.151,9.637 270.151,9.415 269.814,9.078 Q5.2@261.331,9.078 ; 41.384,67.651 41.384,138.053 45.212,141.881 ; 41.384,67.651 v1(41.384,65.26) 89.729,16.915 PF2.1@99.06,16.915 99.879,16.915 100.455,17.491 100.455,55.751 v1(106.68,61.976) ; 105.156,83.82 105.156,63.5 v1(106.68,61.976)
  Top Layer w0.5: C22.1@114.3,142.476 115.373,142.476 115.824,142.025 ; S6.3@118.571,142.536 118.301,142.536 118.285,142.52 118.285,142.025 117.992,141.732 116.117,141.732 115.824,142.025 ; S6.1@118.571,144.436 118.301,144.436 118.285,144.452 118.285,144.487 117.992,144.78 116.117,144.78 115.824,144.487 115.824,142.025 ; v1(161.897,65.668) 180.049,83.82 182.88,86.651 182.88,91.654 182.821,91.713 ; v1(182.88,143.256) 182.88,140.501 ; S4.3@189.421,141.52 188.109,140.208 183.173,140.208 182.88,140.501 ; 245.872,90.424 244.583,91.713 182.821,91.713 ; 182.821,91.713 182.821,92.183 182.88,92.242 182.88,140.501
  Top Layer w1.5: C9.2@108.712,13.208 108.179,12.675 108.179,11.433 108.944,10.668 108.295,10.019 108.295,8.777 C11.1@108.944,8.128
  Bottom Layer w0.254: v1(161.897,65.668) 161.897,60.099 169.672,52.324 v1(169.672,15.748) ; v1(221.488,67.564) 221.488,64.516 235.204,50.8 235.204,30.48 ; DR.A@234.998,9.144 235.204,9.35 235.204,30.48 ; v1(261.112,17.272) 247.904,30.48 235.204,30.48
5V_FUSED1: C13.1 CN1.2 CN1.3 S1.6 | length 76.4
  Top Layer w0.254: C13.1@243.84,59.436 244.72,59.436 247.396,62.112
  Top Layer w0.5: S1.6@230.597,67.728 238.088,67.728 243.704,62.112 247.396,62.112 256.247,62.112 256.54,62.405 256.54,62.484 259.08,59.944 275.111,59.944 275.404,60.237 275.404,65.024
  Top Layer w1.5: v2(268.732,66.04) 268.898,65.874 271.204,65.874 271.204,65.024 275.404,65.024
  Bottom Layer w1.5: CN1.3@265.75,74.143 CN1.2@268.25,74.143 268.25,72.11 268.732,71.628 v2(268.732,66.04)
5V_FUSED2: C15.2 CN2.2 CN2.3 S2.6 | length 41.8
  Top Layer w0.254: 271.247,139.725 271.247,139.397 273.812,136.832 C15.2@273.812,136.652
  Top Layer w0.5: S2.6@261.886,141.732 266.7,141.732 269.24,139.192 270.715,139.192 271.247,139.725 272.747,141.224 274.222,141.224 275.404,142.406 275.404,142.963 275.111,143.256 272.796,143.256
  Top Layer w1.5: v2(268.732,146.304) 268.333,145.905 268.333,144.663 269.212,143.784 272.268,143.784 272.796,143.256
  Bottom Layer w1.5: CN2.3@265.75,155.143 268.021,155.143 CN2.2@268.224,154.94 ; CN2.2@268.25,155.143 268.25,146.786 v2(268.732,146.304)
5V_FUSED3: C19.1 CN3.2 CN3.3 S3.6 | length 59.8
  Top Layer w0.254: C19.1@186.204,61.976 186.436,62.208 186.436,64.652
  Top Layer w0.5: S3.6@172.177,65.696 179.16,65.696 179.324,65.532 179.832,65.532 180.712,64.652 186.436,64.652 195.952,64.652 198.12,62.484 201.49,62.484 201.998,61.976 204.724,61.976 205.308,62.56 205.308,65.836
  Top Layer w1.5: v2(199.31,66.51) 204.634,66.51 205.308,65.836
  Bottom Layer w1.5: CN3.3@193.75,74.143 CN3.2@196.25,74.143 196.95,73.443 196.95,66.548 v2@199.136,66.548
5V_FUSED4: C21.1 CN4.2 CN4.3 S4.6 | length 41.3
  Top Layer w0.254: 202.184,141.732 202.576,141.34 C21.1@202.576,139.192
  Top Layer w0.5: S4.6@191.989,143.42 192.259,143.42 193.111,144.272 197.612,144.272 200.152,141.732 202.184,141.732 205.248,141.732 205.541,142.025 205.541,142.439 202.35,145.63
  Top Layer w1.5: v2(197.104,147.828) 197.104,146.509 197.983,145.63 202.35,145.63
  Bottom Layer w1.5: CN4.3@193.75,155.143 193.912,154.981 CN4.2@196.088,154.981 ; CN4.2@196.25,155.143 196.25,153.762 199.023,150.989 199.023,149.747 v2(197.104,147.828)